# EAGLE board Lightcontrol (EAGLE 7.3.0)
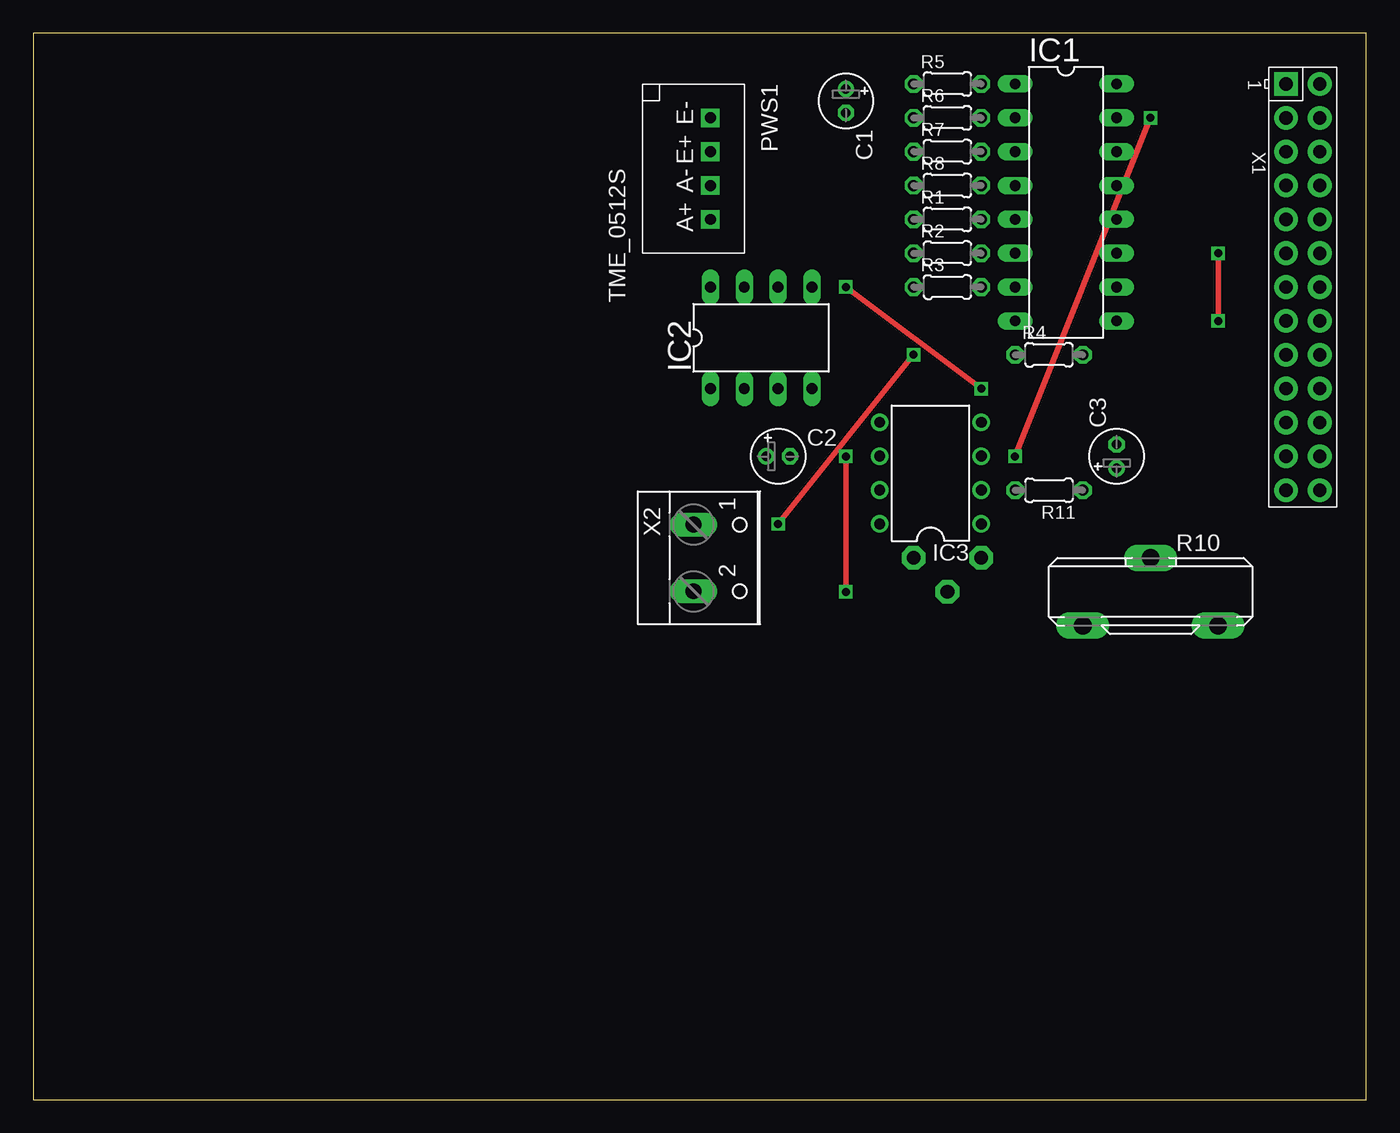
[diagram p0: board, top side]
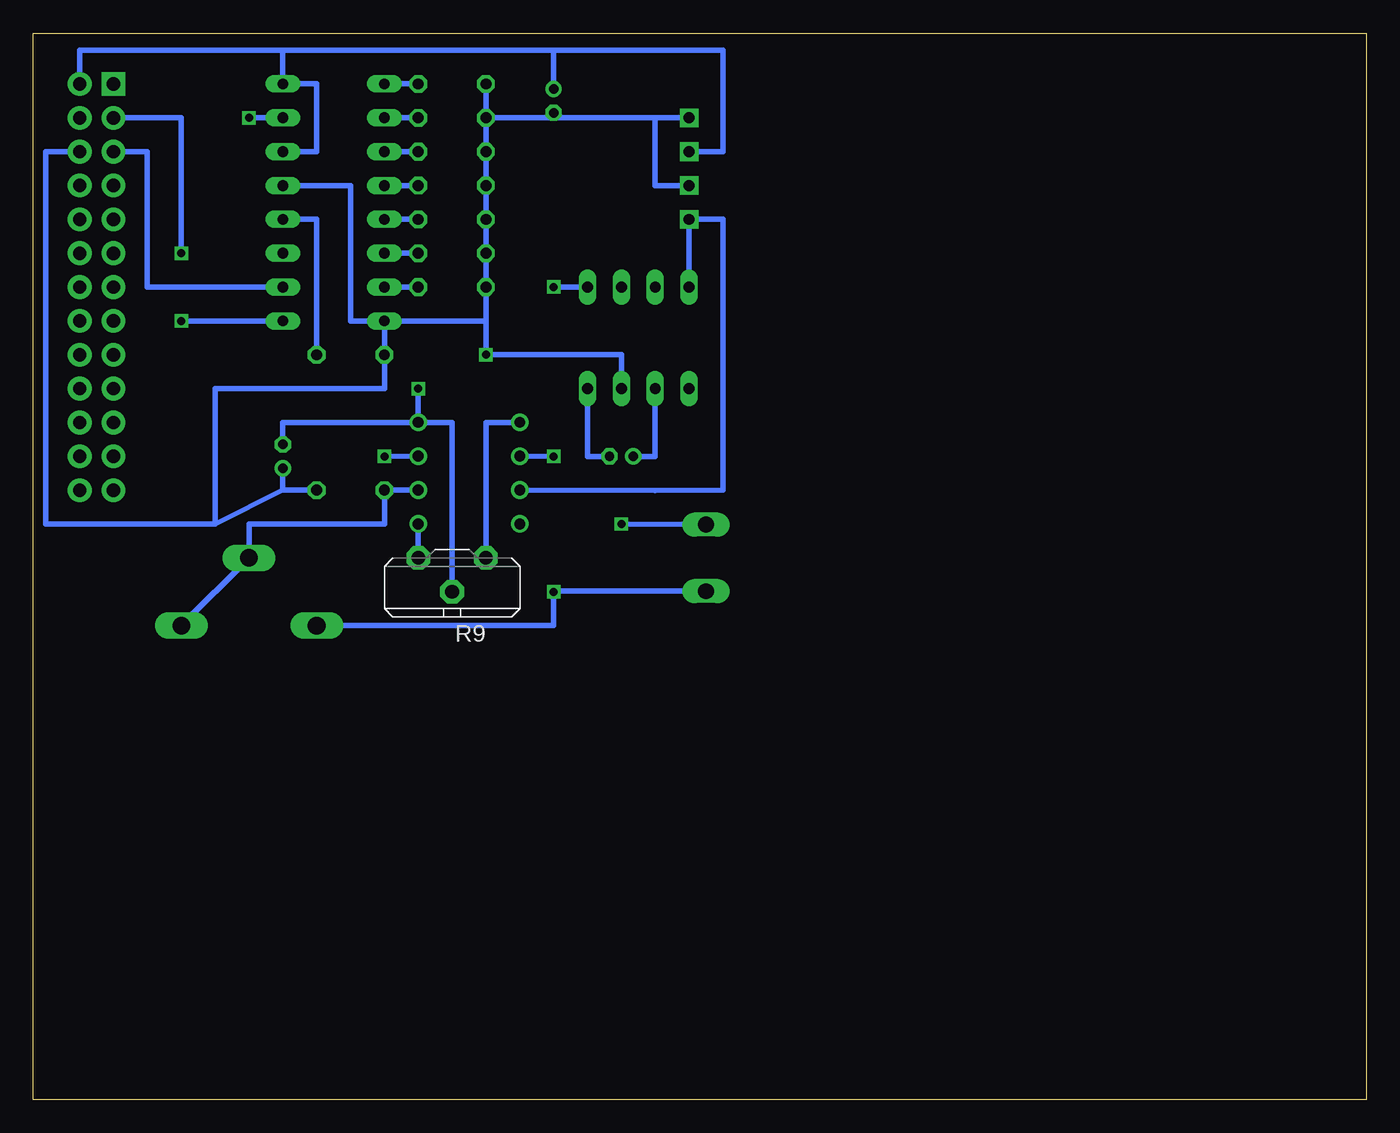
[diagram p1: board, bottom side, seen from below]

Size 100 x 80 mm. Coordinates in mm from the lower left corner, seen from the top.
Outline: 0,0 100,0 100,80 0,80 0,0
Copper layers (1*16): Top 0.035mm / dielectric 1.5mm / Bottom 0.035mm
Design rules "default": minimum track width 10mil, minimum drill 24mil, track to track 8mil, track to pad 8mil, pad to pad 8mil, via to via 8mil, smd to smd 8mil, copper to edge 40mil, drill to drill 8mil, minimum pad ring 10mil, minimum via ring 8mil, stop-mask expansion 4mil, vias tented up to drill 0mil, thermal gap 10mil

## Footprints (pad centres in the part's own frame; a part is rotated, then mirrored left to right if it is on the bottom)
E1,8-4 = drill 0.711 pad 1.168: + -0.889,0 | drill 0.711 pad 1.168 octagon: - 0.889,0
DIL16 = drill 0.813 long: 1 -8.89,-3.81; 2 -6.35,-3.81; 3 -3.81,-3.81; 4 -1.27,-3.81; 5 1.27,-3.81; 6 3.81,-3.81; 7 6.35,-3.81; 8 8.89,-3.81; 9 8.89,3.81; 10 6.35,3.81; 11 3.81,3.81; 12 1.27,3.81; 13 -1.27,3.81; 14 -3.81,3.81; 15 -6.35,3.81; 16 -8.89,3.81
DIL8 = drill 0.813 long: 1 -3.81,-3.81; 2 -1.27,-3.81; 3 1.27,-3.81; 4 3.81,-3.81; 5 3.81,3.81; 6 1.27,3.81; 7 -1.27,3.81; 8 -3.81,3.81
DIL08 = drill 0.813 pad 1.27: 1 -3.81,-3.81; 2 -1.27,-3.81; 3 1.27,-3.81; 4 3.81,-3.81; 5 3.81,3.81; 6 1.27,3.81; 7 -1.27,3.81; 8 -3.81,3.81
TMEXXXXS = drill 0.813 pad 1.397 square: 1 -3.81,1.27; 2 -1.27,1.27; 3 1.27,1.27; 4 3.81,1.27
0204/5 = drill 0.813 octagon: 1 -2.54,0; 2 2.54,0
PT-10S = drill 1.016 pad 1.778 octagon: 1 -2.54,-1.27; 2 2.54,-1.27; 3 0,1.27
ST15 = drill 1.321 long: A -5.08,-2.54; E 5.08,-2.54; S 0,2.54
RASPI_GPIO_AB_PIN = drill 1 pad 1.778 square: 1 -15.24,-1.27 | drill 1 pad 1.778: 2 -15.24,1.27; 3 -12.7,-1.27; 4 -12.7,1.27; 5 -10.16,-1.27; 6 -10.16,1.27; 7 -7.62,-1.27; 8 -7.62,1.27; 9 -5.08,-1.27; 10 -5.08,1.27; 11 -2.54,-1.27; 12 -2.54,1.27; 13 0,-1.27; 14 0,1.27; 15 2.54,-1.27; 16 2.54,1.27; 17 5.08,-1.27; 18 5.08,1.27; 19 7.62,-1.27; 20 7.62,1.27; 21 10.16,-1.27; 22 10.16,1.27; 23 12.7,-1.27; 24 12.7,1.27; 25 15.24,-1.27; 26 15.24,1.27
W237-102 = drill 1.194 long: 1 -2.5,-1.27; 2 2.5,-1.27

## Placement (x,y rotation side)
C1  [E1,8-4]  60.96,74.93 270 top
C2  10µF  [E1,8-4]  55.88,48.26 0 top
C3  10µF  [E1,8-4]  81.28,48.26 90 top
IC1  PCF8591P  [DIL16]  77.47,67.31 270 top
IC2  TC7660DIL8  [DIL8]  54.61,57.15 0 top
IC3  UA741P  [DIL08]  67.31,47 90 top
PWS1  TME_0512S  [TMEXXXXS]  49.53,69.85 270 top
R1  [0204/5]  68.58,66.04 0 top
R2  [0204/5]  68.58,63.5 0 top
R3  [0204/5]  68.58,60.96 0 top
R4  [0204/5]  76.2,55.88 0 top
R5  [0204/5]  68.58,76.2 0 top
R6  [0204/5]  68.58,73.66 0 top
R7  [0204/5]  68.58,71.12 0 top
R8  [0204/5]  68.58,68.58 0 top
R9  100k  [PT-10S]  68.58,39.37 180 bottom
R10  5M  [ST15]  83.82,38.1 0 top
R11  1M  [0204/5]  76.2,45.72 180 top
X1  RASPI_GPIO_AB_PIN  [RASPI_GPIO_AB_PIN]  95.25,60.96 270 top
X2  [W237-102]  50.8,40.64 270 top

## Library data of the parts
C1-C3 = resistor
IC1 = micro-philips; MF: FARNELL; MPN: PCF8591P; OC_FARNELL: 396412; OC_NEWARK: 07WX3385
IC2 = microchip_tc7660
IC3 = linear
PWS1 = traco-electronic; MPN: TME 0512S; OC_FARNELL: 1007540; OC_NEWARK: 51R5323
R1-R9 R11 = rcl
R10 = pot
X1 = raspberrypi_bastelstube_v13
X2 = con-wago-500; MPN: 237-102; OC_FARNELL: unknown; OC_NEWARK: 70K9898

## Nets
3V3: X1.1
GND: C1.- C3.+ IC1.8 IC1.13 IC2.3 PWS1.1 PWS1.3 R1.1 R2.1 R3.1 R4.1 R5.1 R6.1 R7.1 R8.1 R11.1 X1.6 X2.1
N$1: IC1.15 IC3.3
N$2: IC3.1 R9.2
N$3: C3.- IC2.5 IC3.4 R9.3
N$4: IC1.9 X1.3
N$5: IC1.10 X1.5
N$6: IC1.5 R1.2
N$7: IC1.6 R2.2
N$8: IC1.7 R3.2
N$9: IC1.12 R4.2
N$10: IC1.1 R5.2
N$11: IC1.2 R6.2
N$12: IC1.3 R7.2
N$13: IC1.4 R8.2
N$14: IC3.5 R9.1
N$15: C1.+ IC1.14 IC1.16 PWS1.2 X1.2
N$19: IC3.6 R10.A X2.2
N$21: IC3.2 R10.E R10.S R11.2
N$23: IC2.8 IC3.7 PWS1.4
N$25: C2.+ IC2.2
N$26: C2.- IC2.4

## Tracks (layer width: path | path; a pad name or v marks a point on that pad's centre or on a via)
GND  (via drill 0.6)
  Top 0.406: v55.88,43.18 v66.04,55.88
  Bottom 0.406: X1.6 99.06,71.12 99.06,43.18 86.36,43.18 | 86.36,43.18 86.36,53.34 73.66,53.34 R4.1 IC1.8 | R6.1 R7.1 R8.1 R1.1 R2.1 R3.1 66.04,58.42 | R6.1 R5.1 | IC1.8 76.2,58.42 76.2,68.58 IC1.13 | PWS1.1 53.34,73.66 | PWS1.3 53.34,68.58 53.34,73.66 | 60.96,73.66 53.34,73.66 | C1.- 60.96,73.66 | 60.96,73.66 R6.1 | R11.1 81.28,45.72 | C3.+ 81.28,45.72 | 81.28,45.72 86.36,43.18 | 66.04,58.42 IC1.8 | IC2.3 55.88,55.88 v66.04,55.88 66.04,58.42 | X2.1 v55.88,43.18
N$1  (via drill 0.6)
  Top 0.406: v83.82,73.66 v73.66,48.26
  Bottom 0.406: IC1.15 v83.82,73.66 | v73.66,48.26 v73.67,48.26 IC3.3
N$2
  Bottom 0.406: R9.2 IC3.1
N$3  (via drill 0.6)
  Top 0.406: v60.96,60.96 v71.12,53.34
  Bottom 0.406: IC3.4 81.28,50.8 C3.- | IC2.5 v60.96,60.96 | v71.12,53.34 IC3.4 | R9.3 68.59,50.8 IC3.4
N$4  (via drill 0.6)
  Top 0.406: v88.9,63.5 v88.9,58.42
  Bottom 0.406: X1.3 88.9,73.66 v88.9,63.5 | v88.9,58.42 IC1.9
N$5
  Bottom 0.406: X1.5 91.44,71.12 91.44,60.96 IC1.10
N$6
  Bottom 0.406: IC1.5 R1.2
N$7
  Bottom 0.406: IC1.6 R2.2
N$8
  Bottom 0.406: IC1.7 R3.2
N$9
  Bottom 0.406: R4.2 78.74,66.04 IC1.12
N$10
  Bottom 0.406: IC1.1 R5.2
N$11
  Bottom 0.406: IC1.2 R6.2
N$12
  Bottom 0.406: IC1.3 R7.2
N$13
  Bottom 0.406: IC1.4 R8.2
N$14
  Bottom 0.406: R9.1 66.05,50.8 IC3.5
N$15
  Bottom 0.406: X1.2 96.52,78.74 81.28,78.74 | 81.28,78.74 60.96,78.74 | 60.96,78.74 48.26,78.74 48.26,71.12 PWS1.2 | 81.28,78.74 IC1.16 78.74,76.2 78.74,71.12 IC1.14 | C1.+ 60.96,78.74
N$19  (via drill 0.6)
  Top 0.406: v60.96,48.26 v60.96,38.1
  Bottom 0.406: X2.2 60.96,38.14 v60.96,38.1 60.96,35.56 R10.A | IC3.6 v60.96,48.26
N$21
  Bottom 0.406: R11.2 IC3.2 R11.2 | R11.2 73.66,43.18 83.82,43.18 R10.S R10.E
N$23
  Bottom 0.406: IC3.7 53.35,45.71 48.26,45.72 48.26,66.04 PWS1.4 | PWS1.4 | PWS1.4 IC2.8
N$25
  Bottom 0.406: C2.+ 53.34,48.26 IC2.2
N$26
  Bottom 0.406: IC2.4 58.42,48.26 C2.-